# Altium PCB Dangle.PcbDoc
Units mil, origin at the board's own origin, x right, y up, seen from the top; angles counter-clockwise.
Board outline 560 x 1160 mil, 2 copper layers (Top1, Bottom2), stack 63.824 mil thick; 23 components, 51 nets, 139 pads, 38 vias.
Unrouted connection lines stored in the file: 57.
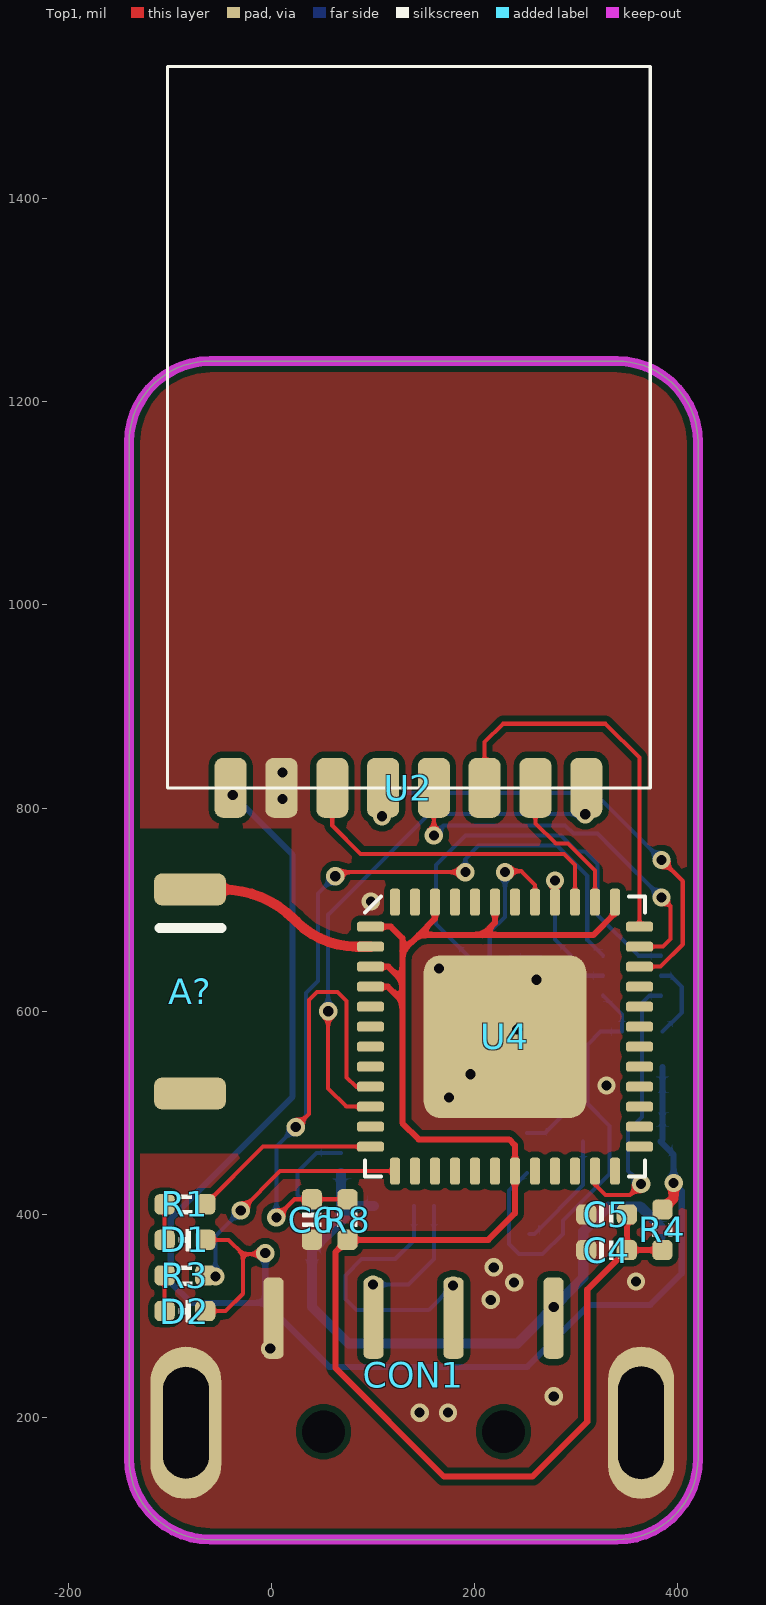
[diagram p0: Top1 view]
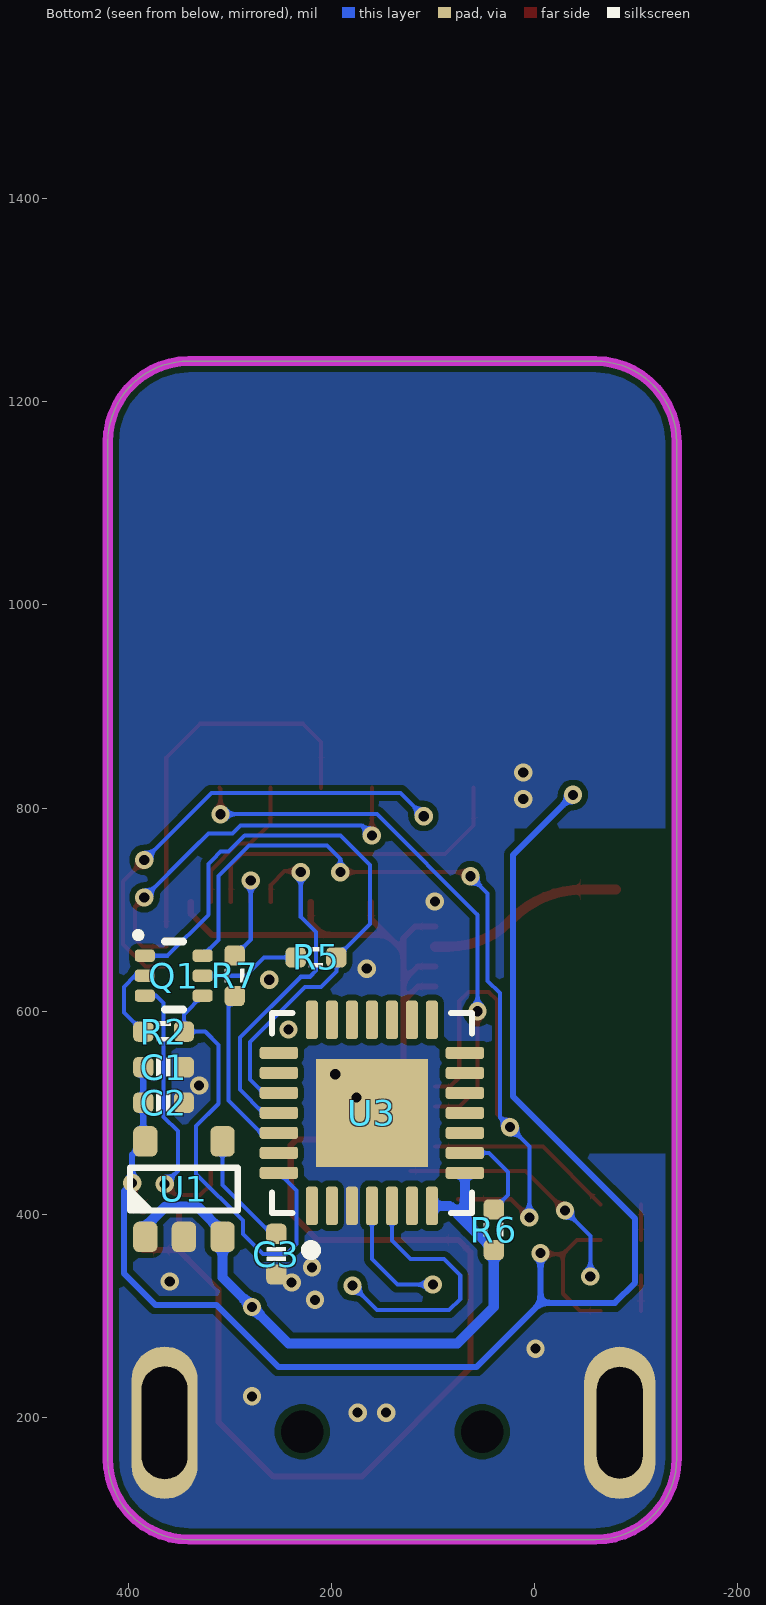
[diagram p1: Bottom2 view, seen from below]

## Layer stack, top to bottom
Top Solder: solder mask 0.4, Solder Resist, Dk 3.5
Top1: signal copper 1.4
Dielectric1: core 61.0236, FR-4, Dk 4.2
Bottom2: signal copper 1.4
Bottom Solder: solder mask 0.4, Solder Resist, Dk 3.5

## Board outline
-140,160 ccw(c-60,160) -60,80 340,80 ccw(c340,160) 420,160 420,1160 ccw(c340,1160) 340,1240 -60,1240 ccw(c-60,1160) -140,1160

## Design rules (kind name [scope] priority, off if disabled: settings)
Clearance Clearance_Logo [InNetClass('Logo')] p1: gap=8 ignorepadtopadclearanceinfootprint=FALSE
Clearance [All] p2: gap=6 ignorepadtopadclearanceinfootprint=FALSE
ComponentClearance [All] p1: gap=0 collisioncheckmode=3 verticalgap=0 showdistances=FALSE
DiffPairsRouting [All] p1: maxlimit=9 minlimit=9 mostfreqgap=9 toplayer_minwidth=15 toplayer_maxwidth=15 toplayer_prefwidth=15 bottomlayer_minwidth=15 bottomlayer_maxwidth=15 bottomlayer_prefwidth=15 maxuncoupledlength=500
FanoutControl Fanout_BGA [All] p1: bgadir=Out bgaviamode=Centered fanoutstyle=Auto fanoutdirection=Alternating viagrid=1 // Fanout_BGA (Default Rule)
HoleSize [All] p1: absolutevalues=TRUE maxlimit=10000 minlimit=8 maxpercent=80.000 minpercent=20.000
MinimumSolderMaskSliver [All] p1 off: minsoldermaskwidth=2
PlaneClearance [All] p1: clearance=8
PlaneConnect [All] p1: planeconnectstyle=Direct reliefexpansion=20 reliefentries=4 reliefconductorwidth=10 reliefairgap=10
PolygonConnect [All] p1: connectstyle=Direct reliefconductorwidth=10 reliefentries=4 polygonreliefangle="90 Angle" airgapwidth=10
RoutingVias [All] p1: holewidth=8 width=16 viastyle="Through Hole" minholewidth=6 minwidth=12 maxholewidth=28 maxwidth=50
SilkToSilkClearance [All] p1: silktosilkclearance=0
SilkToSolderMaskClearance [IsPad] p1: minsilkscreentomaskgap=0 clearancetoexposedcopper=TRUE
SolderMaskExpansion [All] p1: expansion=3 istentingtop=FALSE
Width Logo [InNetClass('Logo')] p1: maxlimit=100 minlimit=0.1 preferedwidth=10
Width GND [(InNet('AGND') OR InNet('GND'))] p2: maxlimit=50 minlimit=4 preferedwidth=10
Width VCC [(InNet('VDD_SYS_3.3V') OR InNet('VDD_AV_3.3V') OR InNet('VDD_5V') OR InNet('VDD1V2-SYS') OR InNet('VDD1V1-EPHY') OR InNet('VDD-CPUX') OR InNet('VDD-CPUS') OR InNet('VDD-CPUFB') OR InNet('VCC-DRAM'))] p3: maxlimit=50 minlimit=4 preferedwidth=10
Width [All] p4: maxlimit=10000 minlimit=4 preferedwidth=4
21 further rules are at their usual default settings.

## Components (designator, comment, footprint, x,y, rotation, side; value= is the part's Value field where it differs from the comment)
A? "RAINSUN" ANT-Rainsun-AN5120 -80,620 r270 top
C1 "0.1uF" CAP_0402 365,545 r0 bottom value=0.1u
C2 "10uF" CAP_0402 365,510 r0 bottom value=0.1u
C3 "10nF" CAP_0402 254,361 r90 bottom value=0.1u
C4 "10uF" CAP_0402 330,365 r0 top value=0.1u
C5 "0.1uF" CAP_0402 330,400 r0 top value=0.1u
C6 "1uF" CAP_0402 40,395 r270 top value=0.1u
CON1 "USB_Plug_TypeA" USB_Plug_TypeA 140,80 r270 top
D1 "color?" LED_0402_RED -85,375 r180 top
D2 "color?" LED_0402_RED -85,305 r180 top
Q1 "BC847BVC-7" SOT563-6 355,635 r270 bottom
R1 "1K" RES_0402 -85,410 r0 top value=22R
R2 "12K" RES_0402 365,580 r0 bottom value=22R
R3 "1K" RES_0402 -85,340 r0 top value=22R
R4 "0R" RES_0402 385,385 r270 top value=22R
R5 "12K" RES_0402 215,653 r0 bottom value=22R
R6 "10K" RES_0402 40,385 r90 bottom value=22R
R7 "200R" RES_0402 295,635 r270 bottom value=22R
R8 "10K" RES_0402 75,395 r90 top value=22R
U1 "LP2992 3V3" SOT23-5 345,425 r90 bottom
U2 "NRF24L01" NRF24L01-MODULE -40,820 r0 top
U3 "CP2102" QFN-28 160,500 r90 bottom value=Value
U4 "ESP32_SIP" QFN-48_7X7 230,575 r0 top

## Footprints (in the part's own frame and the unit in brackets; to place one, negate y for a bottom-side part, rotate by r counter-clockwise, add the part's x,y. Pads: shape width x height; smd on the part's side, far side on the other; paste and mask are expansions set on the pad)
ANT-Rainsun-AN5120 [mm] "选择焊盘"
  rrect50% 0.8x1.8 smd: 1(-2.54,0) ""(2.563,0)
  silkscreen extent -1.57,-0.76 -1.57,0.79, body extent -2.57,-0.91 2.54,0.94, height 1.32
CAP_0402 [mil]
  rrect50% 20x20 smd: 1(-20,0) 2(20,0)
  silkscreen extent -6,-9 6,9, body extent -20,-10 20,10, height 20
LED_0402_RED [mil]
  rrect50% 20x20 smd: 1(-20,0) 2(20,0)
  silkscreen extent -6,-10 6,10, body extent -20,-10 20,10, height 18
NRF24L01-MODULE [mm]
  rrect50% 0.8x1.5 smd: 1(0,0) 2(1.27,0) 3(2.54,0) 4(3.81,0) 5(5.08,0) 6(6.35,0) 7(7.62,0) 8(8.89,0)
  silkscreen extent -1.57,0 10.49,18.03
QFN-28 [mil]
  rrect50% 38x12 smd mask+5: 1(-91.5,59.06) 2(-91.5,39.37) 3(-91.5,19.69) 4(-91.5,0) 5(-91.5,-19.68) 6(-91.5,-39.37) 7(-91.5,-59.06) 15(91.5,-59.06) 16(91.5,-39.37) 17(91.5,-19.68) 18(91.5,0) 19(91.5,19.69) 20(91.5,39.37) 21(91.5,59.06)
  rrect50% 12x38 smd mask+5: 8(-59.06,-91.5) 9(-39.37,-91.5) 10(-19.68,-91.5) 11(0,-91.5) 12(19.69,-91.5) 13(39.37,-91.5) 14(59.06,-91.5) 22(59.06,91.5) 23(39.37,91.5) 24(19.69,91.5) 25(0,91.5) 26(-19.68,91.5) 27(-39.37,91.5) 28(-59.06,91.5)
  rect 106.3x110.24 smd: 29(0,0)
  silkscreen extent -140,-98 98,98, body extent -99,-99 98,98, height 35
QFN-48_7X7 [mm]
  rrect50% 0.675x0.25 smd: 1(-3.363,2.75) 2(-3.363,2.25) 3(-3.363,1.75) 4(-3.363,1.25) 5(-3.363,0.75) 6(-3.363,0.25) 7(-3.363,-0.25) 8(-3.363,-0.75) 9(-3.363,-1.25) 10(-3.363,-1.75) 11(-3.363,-2.25) 12(-3.363,-2.75) 25(3.363,-2.75) 26(3.363,-2.25) 27(3.363,-1.75) 28(3.363,-1.25) 29(3.363,-0.75) 30(3.363,-0.25) 31(3.363,0.25) 32(3.363,0.75) 33(3.363,1.25) 34(3.363,1.75) 35(3.363,2.25) 36(3.363,2.75)
  rrect50% 0.25x0.675 smd: 13(-2.75,-3.363) 14(-2.25,-3.363) 15(-1.75,-3.363) 16(-1.25,-3.363) 17(-0.75,-3.363) 18(-0.25,-3.363) 19(0.25,-3.363) 20(0.75,-3.363) 21(1.25,-3.363) 22(1.75,-3.363) 23(2.25,-3.363) 24(2.75,-3.363) 37(2.75,3.363) 38(2.25,3.363) 39(1.75,3.363) 40(1.25,3.363) 41(0.75,3.363) 42(0.25,3.363) 43(-0.25,3.363) 44(-0.75,3.363) 45(-1.25,3.363) 46(-1.75,3.363) 47(-2.25,3.363) 48(-2.75,3.363)
  rrect20% 4.064x4.064 smd: 49(0,0)
  silkscreen extent -3.5,-3.5 3.5,3.5, body extent -3.5,-3.5 3.5,3.5, height 1
RES_0402 [mil]
  rrect50% 20x20 smd: 1(-20,0) 2(20,0)
  silkscreen extent -6,-10 6,10, body extent -20,-10 20,10, height 14
SOT23-5 [mil]
  rrect50% 30x24 smd: 1(-47,38) 2(-47,0) 3(-47,-38) 4(47,-38) 5(47,38)
  silkscreen extent -21,-53 21,53, body extent -55,-57 55,57, height 57
SOT563-6 [mm]
  rrect50% 0.305x0.5 smd paste+0 mask+0: 1(-0.5,-0.723) 2(0,-0.723) 3(0.5,-0.723) 4(0.5,0.723) 5(0,0.723) 6(-0.5,0.723)
  silkscreen extent -1.09,-0.97 0.85,0.23, body extent -0.8,-0.8 0.8,0.8, height 0.6
USB_Plug_TypeA [mil]
  round 32 hole 42: 0(-106.3,88.58) 0(-106.3,-88.58)
  rrect50% 80x20 smd: 1(-218,137.8) 2(-218,39.37) 3(-218,-39.37) 4(-218,-137.8)
  oval 150x65 hole 45 slot 111 at 0 deg: 4(-115,224)
  oval 150x70 hole 45 slot 110 at 0 deg: 4(-115,-224)
  body extent -146,-236 576,236, height 70

## Part data
A?: library part ANT-Rainsun-AP5120
C1 C2 C3 C4 C5 C6: library part 电容-0402, "Capacitor"
CON1: "USB"
D1 D2: library part LED_0402, "LED", Type=0402
R1 R2 R3 R4 R5 R6 R7 R8: library part 电阻-0402, "Resistor"
U1: library part LP2992, "LDO"
U2: library part NRF24L01模块
U3: "USB转TTL", MFG #1="SILICON LABS", PART DESC="SINGLE-CHIP USB TO UART BRIDGE, QFN28, RoHS.", PART NUMBER=CP2102, RefDes=RefDes, Type=DEV
U4: library part ESP32-PICO

## Via types
v1: diameter 18, hole 10, Top1 to Bottom2, tented both sides, 38 vias

## Nets (pads, with @x,y where several pads share a name; then routed paths per layer and width w, separated by ;. In a path a pad name is that pad's centre, name@x,y a point inside that pad or via, vN(x,y) a via of type N, cw(c..) or ccw(c..) an arc to the next point about the centre after c; other vN are vias at no path point)
3V3A: C4.2 C5.2 R4.2 R8.1 U4.1 U4.3 U4.4 U4.19 U4.37 U4.43 U4.46 | length 1668
  Top1 w6: U4.4 114.79,624.21 129,610 ; U4.3 115.1,643.9 129,630 ; U4.1 117.73,683.27 129,672 129,659 ; U4.46 161.1,691.1 145.05,675.05 ; U4.43 220.16,687.16 208.05,675.05 ; U4.37 338.27,696.27 317.05,675.05 208.05,675.05 ; C5.2 C4.2 ; R4.2 C4.2 ; 129,610 129,630 ; 129,610 129,490 145,474 234,474 239.84,468.16 U4.19 239.84,401.16 213.69,375 R8.1 63,363 63,249 170,142 257,142 311,196 311,326 C4.2 ; 129,630 129,659 ; 129,659 145.05,675.05 ; 145.05,675.05 208.05,675.05
BOOT_1: Q1.3 U4.23 | length 278.2
  Top1 w4: U4.23 318.58,429.42 329,419 353,419 v1(364,430)
  Bottom2 w4: v1(364,430) 351,443 351,482 365,496 365,608 372.32,615.32 Q1.3
CP_Rx_1: U3.25 U4.41 | length 357.2
  Top1 w4: v1(230,737) 231,738 246,738 259.53,724.47 U4.41
  Bottom2 w4: v1(230,737) 230,693 215,678 215,640 221,634 230,634 290,574 290,523 267,500 U3.25
CP_Tx_1: R7.1 U4.40 | length 101.7
  Top1 w4: U4.40 v1(279.21,728.79)
  Bottom2 w4: v1(279.21,728.79) 279.21,670.79 R7.1
DTR_1: Q1.4 R2.1 U3.28 | length 439.1
  Bottom2 w4: U3.28 234,423.44 234,371 244,361 267,361 287,381 287,394 333,440 333,487 311,509 311,567 324,580 R2.1 345,596.85 Q1.4
ESP_EN_1: C6.1 Q1.6 R8.2 U4.9 | length 1079.6
  Top1 w4: v1(5,397) 23,415 C6.1 R8.2 ; v1(24,486) 37,499 37,611 45,619 65,619 74,610 74,535 83.21,525.79 U4.9 ; v1(63,733) 67,737 v1(191,737)
  Bottom2 w4: v1(5,397) 5,467 v1(24,486) 34,496 34,618 46,630 46,716 v1(63,733) ; v1(191,737) 191,750 204,763 281,763 311,733 311,670.22 Q1.6
FLASH_CLK_1: U4.31
FLASH_CS_1: U4.25
FLASH_SD0_1: U4.27
FLASH_SD1_1: U4.33
FLASH_SD2_1: U4.30
FLASH_SD3_1: U4.32
GND: C1.1 C2.1 C3.1 C4.1 C5.1 C6.2 CON1.4 U1.2 U2.2 U3.3 U3.29 U4.49
  other v1: 146,205 174,205 278,221 -1,268 216,316 239,333 359,334 219,348 175,515 330,527 196,538 242,582 261,631 165,642 98,708 11,809 11,835
GPIO2_1: U4.22
GPIO4_1: U4.24
GPIO5_1: U2.4 U4.34 | length 455.3
  Top1 w4: U4.34 382.9,643.9 405,666 405,728 v1(384,749)
  Bottom2 w4: v1(109,792) 132,815 318,815 v1(384,749)
GPIO9_1: U4.28
GPIO10_1: U4.29
GPIO12_1: U4.18
GPIO13_1: U4.20
GPIO14_1: U4.17
GPIO15_1: U4.21
GPIO18_1: U2.5 U4.35 | length 383
  Top1 w4: v1(160,773) U2.5 ; U4.35 385.58,663.58 393,671 393,703 v1(384,712)
  Bottom2 w4: v1(160,773) 170,783 289.28,783 297.28,775 321,775 337,759 v1(384,712)
GPIO19_1: U2.7 U4.38 | length 144
  Top1 w4: U2.7 260,785 280,765 292.14,765 318.58,738.56 U4.38
GPIO21_1: U4.42
GPIO22_1: U2.3 U4.39 | length 328.7
  Top1 w4: U2.3 60,783 88,755 288,755 298.9,744.1 U4.39
GPIO23_1: U2.6 U4.36 | length 385
  Top1 w4: U2.6 210,865 228,883 329,883 362.38,849.62 U4.36
GPIO25_1: U4.14
GPIO26_1: U4.15
GPIO27_1: U4.16
GPIO32_1: R1.2 U4.12 | length 186.1
  Top1 w4: R1.2 -8.27,466.73 U4.12
GPIO33_1: R3.2 U4.13 | length 243.1
  Top1 w4: v1(-30,404) 8.62,442.62 U4.13
  Bottom2 w4: v1(-55,339) -55,379 v1(-30,404)
GPIO34_1: U2.8 U4.10 | length 540.5
  Top1 w4: v1(56,600) 56,523.9 73.8,506.1 U4.10 ; v1(309,794) 309,819 U2.8
  Bottom2 w4: v1(56,600) 56,695 155,794 v1(309,794)
GPIO35_1: U4.11
GPIO37_1: U4.6
GPIO38_1: U4.7
NetA?_1: A?.1 U4.2 | length 193.1
  Top1 w10: A?.1 -48.42,720 cw(c-48.42,620) 22.29,690.71 25,688 ccw(c83.95,746.95) 83.95,663.58 U4.2
NetC3_2: C3.2 U1.4 | length 115.9
  Bottom2 w4: C3.2 259,381 307,429 U1.4
NetD1_2: D1.2 R1.1 | length 35
  Top1 w4: D1.2 R1.1
NetD2_2: D2.2 R3.1 | length 35
  Top1 w4: D2.2 R3.1
NetQ1_2: Q1.2 R2.2 | length 77
  Bottom2 w4: Q1.2 393,635 404,624 404,599 R2.2
NetQ1_5: Q1.5 R5.2 | length 99
  Bottom2 w4: R5.2 266,653 284,635 Q1.5
NetR6_2: R6.2 U3.9 | length 93
  Bottom2 w4: R6.2 26,419 26,442 44.63,460.63 U3.9
NetR7_2: R7.2 U3.26 | length 168.1
  Bottom2 w4: U3.26 269.32,480.32 301,512 301,609 R7.2
RTS_1: Q1.1 R5.1 U3.24 | length 615
  Bottom2 w4: U3.24 266.69,519.69 280,533 280,569.86 225.86,624 210,624 195,639 R5.1 162,686 162,744 191,773 285.14,773 301,757.14 308.86,757.14 317,749 321,745 321,695 361.32,654.69 Q1.1
SENSOR_VN_1: U4.8
SENSOR_VP_1: U4.5
USB_ESP_DM_1: CON1.2 U3.5 | length 259.2
  Bottom2 w4: U3.5 140.32,374.32 122,356 89,356 73,340 73,317 84,306 155,306 v1(179,330)
USB_ESP_DP_1: CON1.3 U3.4 | length 122.9
  Bottom2 w4: v1(100,331) 135,331 160,356 U3.4
VCC_3V3: C1.2 C2.2 D1.1 D2.1 R4.1 U1.5 U2.1 | length 1567.1
  Top1 w4: D2.1 -45,305 -28,322 -28,361 ; D1.1 -42,375 -28,361 ; v1(-6,362) -7,361 -28,361
  Top1 w10: R4.1 396,416 v1(396,431)
  Bottom2 w6: v1(-38,813) 21,754 21,516 -99,396 -99,333 -79,313 -6,313 ; v1(-6,362) -6,313 ; U1.5 396,459 v1(396,431) 404,423 404,342 373,311 313,311 252,250 57,250 -6,313 ; U1.5@385,474 C2.2 C1.2
VUSB: CON1.1 R6.1 U1.1 U1.3 U3.7 U3.8 | length 640.9
  Bottom2 w10: U3.8 68.5,393.5 ; U3.7 83.5,408.5 68.5,393.5 ; U1.1 383,388 363,408 332,408 307,383 U1.3 307,338 242,273 76,273 40,309 R6.1 68.5,393.5
  other v1: 278,309
pads on no net: A?. CON1.0 U3.1 U3.2 U3.6 U3.10 U3.11 U3.12 U3.13 U3.14 U3.15 U3.16 U3.17 U3.18 U3.19 U3.20 U3.21 U3.22 U3.23 U3.27 U4.26 U4.44 U4.45 U4.47 U4.48

## Polygon pours and split planes (outlines as drawn)
GND on Bottom2 "GND_L02_P001" (solid, remove dead copper, pour order 1): -140,1240 420,1240 420,80 -140,80
GND on Top1 "GND_L01_P000" (solid, remove dead copper, pour order 0): -140,1240 420,1240 420,80 -140,80

## Keep-outs
Keep-Out Layer:
  the board outline again, w10

## Other copper
Top1:
  pour cut-out: -180,780 20,780 20,460 -180,460
Bottom2:
  pour cut-out: -180,780 20,780 20,460 -180,460

## Silkscreen, mask and mechanical layers (free items; w line width, h text height)
Mechanical 1:
  the board outline again, w10
Drill Drawing:
  circle w10: c-66.38,2425.28 r33.33
  lines w10: -99.71,2258.61 -83.04,2258.61 -66.38,2241.94 -49.71,2258.61 -33.04,2258.61 -49.71,2275.28 -33.04,2291.94 -49.71,2291.94 -66.38,2308.61 -83.04,2291.94 -99.71,2291.94 -83.04,2275.28 -99.71,2258.61 ; -99.71,2541.94 -33.04,2541.94 -33.04,2608.61 -99.71,2608.61 -99.71,2541.94 ; -99.71,2758.61 -33.04,2758.61 -66.38,2691.94 -99.71,2758.61
  lines w15: -159.5,2196.94 13088.78,2196.94 ; -159.5,2796.94 13088.78,2796.94 ; 391.38,2046.94 391.38,2946.94 ; 931.24,2046.94 931.24,2946.94 ; 2020.92,2046.94 2020.92,2946.94 ; 2526.8,2046.94 2526.8,2946.94 ; 3260.6,2046.94 3260.6,2946.94 ; 4450.25,2046.94 4450.25,2946.94 ; 5040.1,2046.94 5040.1,2946.94 ; 5785.9,2046.94 5785.9,2946.94 ; 7025.53,2046.94 7025.53,2946.94 ; 7879.3,2046.94 7879.3,2946.94 ; 9212.9,2046.94 9212.9,2946.94 ; 10546.51,2046.94 10546.51,2946.94 ; 11686.18,2046.94 11686.18,2946.94 ; -159.5,2046.94 13088.78,2046.94 13088.78,2946.94 -159.5,2946.94 -159.5,2046.94
  text "Symbol" at -69.5,2841.94 h72
  text "Count" at 436.38,2841.94 h72
  text "Hole Size" at 976.24,2841.94 h72
  text "Plated" at 2065.92,2841.94 h72
  text "Hole Type" at 2571.8,2841.94 h72
  text "Drill Layer Pair" at 3305.6,2841.94 h72
  text "Via/Pad" at 4495.25,2841.94 h72
  text "Pad Shape" at 5085.1,2841.94 h72
  text "Template" at 5830.9,2841.94 h72
  text "Description" at 7070.53,2841.94 h72
  text "Hole Tolerance (+)" at 7924.3,2841.94 h72
  text "Hole Tolerance (-)" at 9257.9,2841.94 h72
  text "Hole Length" at 10591.51,2841.94 h72
  text "Routed Path Length" at 11731.18,2841.94 h72
  text "1" at 436.38,2691.94 h60
  text "45.00mil (1.143mm)" at 976.24,2691.94 h60
  text "PTH" at 2065.92,2691.94 h60
  text "Slot" at 2571.8,2691.94 h60
  text "Top1 - Bottom2" at 3305.6,2691.94 h60
  text "Pad" at 4495.25,2691.94 h60
  text "Rounded" at 5085.1,2691.94 h60
  text "r178_381h114_279r100" at 5830.9,2691.94 h60
  text "110.00mil (2.794mm)" at 10591.51,2691.94 h60
  text "65.00mil (1.651mm)" at 11731.18,2691.94 h60
  text "1" at 436.38,2541.94 h60
  text "45.00mil (1.143mm)" at 976.24,2541.94 h60
  text "PTH" at 2065.92,2541.94 h60
  text "Slot" at 2571.8,2541.94 h60
  text "Top1 - Bottom2" at 3305.6,2541.94 h60
  text "Pad" at 4495.25,2541.94 h60
  text "Rounded" at 5085.1,2541.94 h60
  text "r165_381h114_282r100" at 5830.9,2541.94 h60
  text "111.00mil (2.819mm)" at 10591.51,2541.94 h60
  text "66.00mil (1.676mm)" at 11731.18,2541.94 h60
  text "2" at 436.38,2391.94 h60
  text "42.00mil (1.067mm)" at 976.24,2391.94 h60
  text "PTH" at 2065.92,2391.94 h60
  text "Round" at 2571.8,2391.94 h60
  text "Top1 - Bottom2" at 3305.6,2391.94 h60
  text "Pad" at 4495.25,2391.94 h60
  text "Rounded" at 5085.1,2391.94 h60
  text "c81h107" at 5830.9,2391.94 h60
  text "-" at 10591.51,2391.94 h60
  text "-" at 11731.18,2391.94 h60
  text "38" at 436.38,2241.94 h60
  text "10.00mil (0.254mm)" at 976.24,2241.94 h60
  text "PTH" at 2065.92,2241.94 h60
  text "Round" at 2571.8,2241.94 h60
  text "Top1 - Bottom2" at 3305.6,2241.94 h60
  text "Via" at 4495.25,2241.94 h60
  text "Rounded" at 5085.1,2241.94 h60
  text "v46h25m0mx0" at 5830.9,2241.94 h60
  text "-" at 10591.51,2241.94 h60
  text "-" at 11731.18,2241.94 h60
  text "42 Total" at 436.38,2091.94 h60
  text "Slot definitions :" at -69.5,1946.97 h60
  text "Routed Path Length" at 963.19,1946.97 h60
  text "= Calculated from tool start centre position to tool end centre position." at 2065.86,1946.97 h60
  text "Hole Length" at 963.19,1846.99 h60
  text "= Routed Path Length + Tool Size = Slot length as defined in the PCB layout" at 1655.99,1846.99 h60